# Altium PCB 2layer.PcbDoc (part 2 of 2)
Units mil, origin at the board's own origin, x right, y up, seen from the top; angles counter-clockwise.
Board outline 4180.03 x 3445.03 mil, 2 copper layers (Top Layer, Bottom Layer); 118 components, 103 nets, 464 pads, 261 vias.
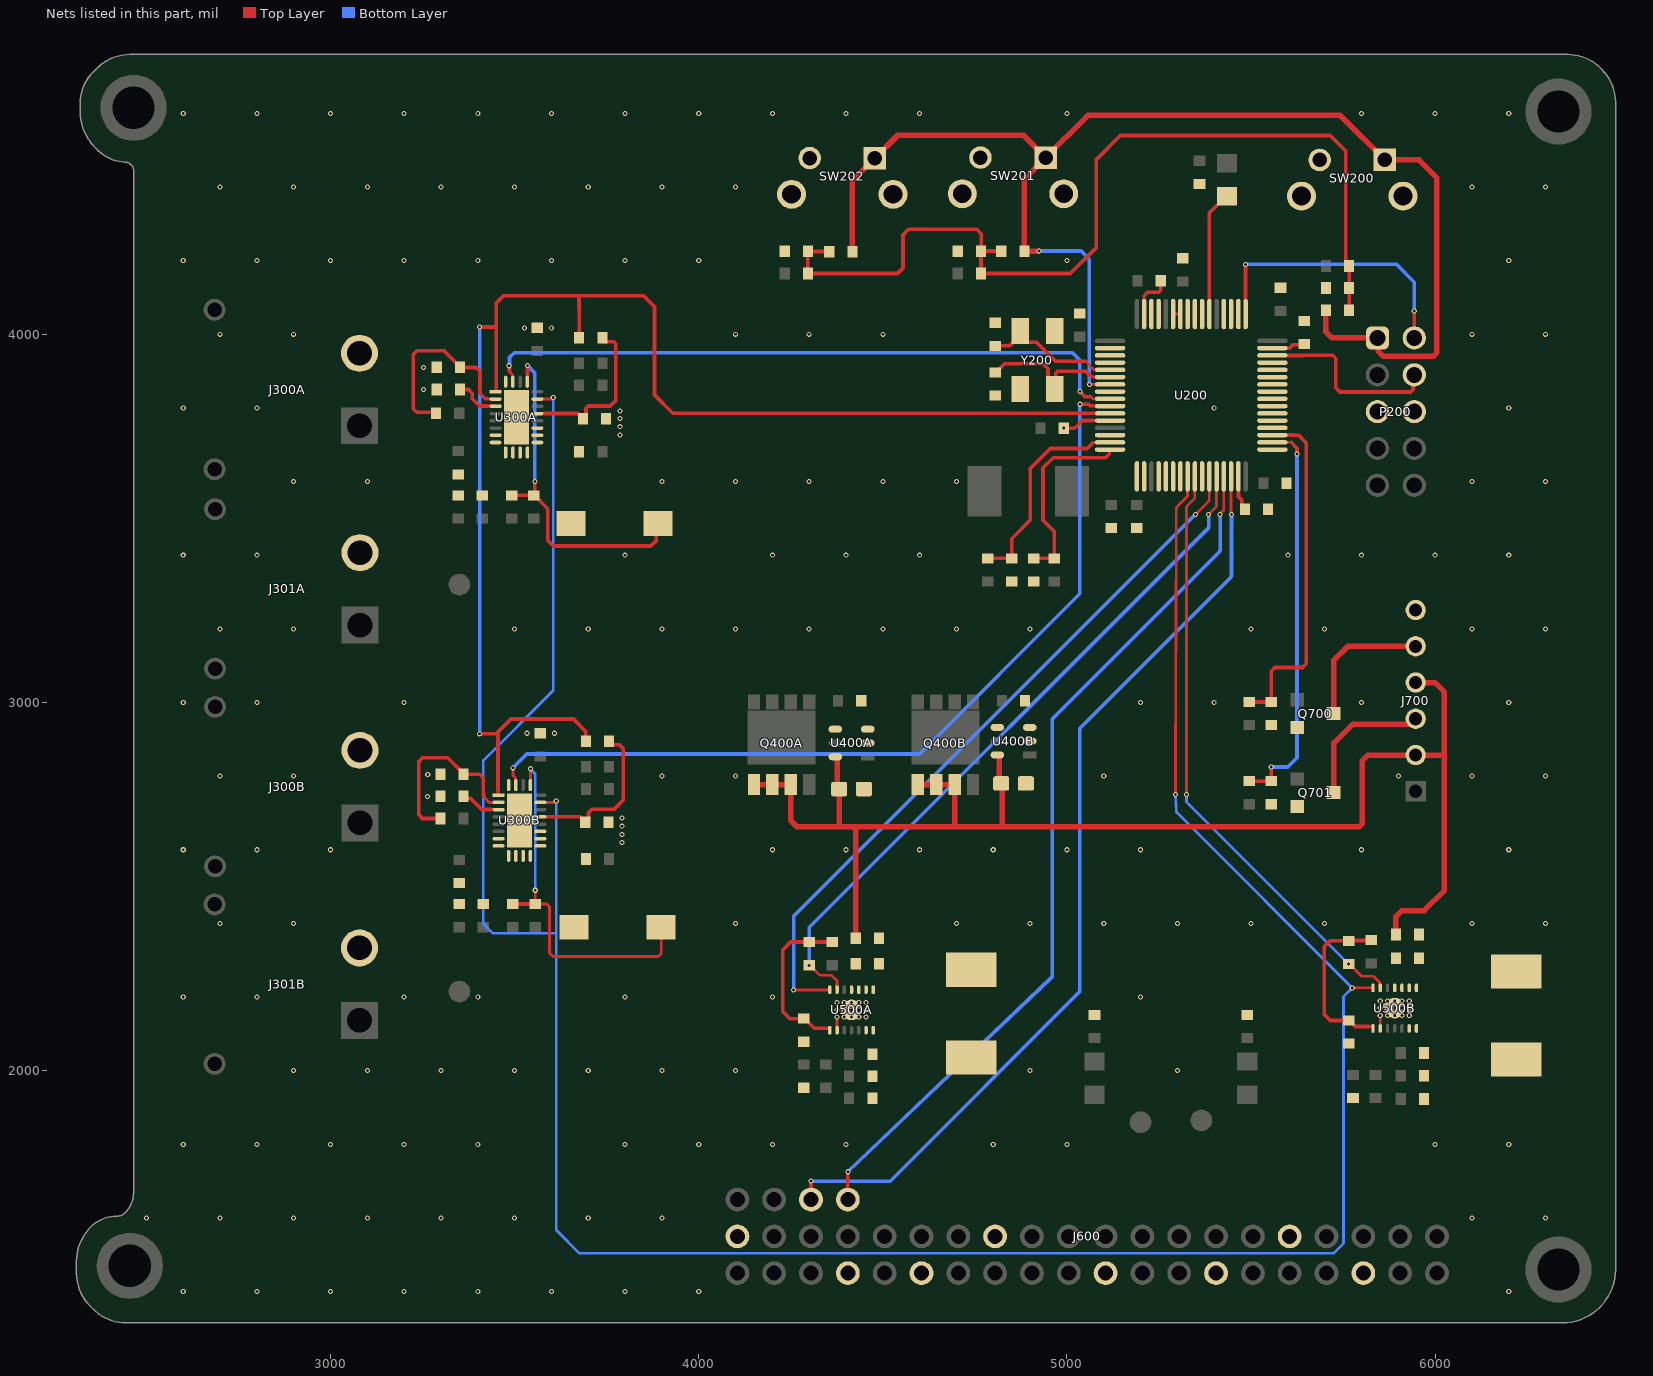
[diagram p2: the nets of this part, all layers, seen from the top]

## Via types
v1: diameter 13.78, hole 7.87, Top Layer to Bottom Layer, 261 vias

## Nets (pads, with @x,y where several pads share a name; then routed paths per layer and width w, separated by ;. In a path a pad name is that pad's centre, name@x,y a point inside that pad or via, vN(x,y) a via of type N, cw(c..) or ccw(c..) an arc to the next point about the centre after c; other vN are vias at no path point) (continued)
GND: C200.1 C201.1 C202.1 C203.1 C204.1 C205.1 C206.1 C207.1 C208.1 C209.1 C210.1 C211.1 C212.1 C213.1 C301A.1 C301B.1 C304A.1 C304B.1 C305A.1 C305B.1 C306A.1 C306B.1 C400A.1 C400B.1 C401A.K C401B.K C500A.1 C500B.1 C501A.1 C501B.1 C502A.2 C502B.2 C503A.2 C503B.2 C504A.2 C504B.2 C505A.1 C505B.1 J300A.N J300B.N J301A.N J301B.N J600.6 J600.9 J600.14 J600.20 J600.25 J600.30 J600.34 J600.39 J700.6 P200.5 P200.6 Q700.3 Q701.3 R202.2 R203.2 R210.2 R304A.1 R304B.1 R305A.1 R305B.1 R306A.2 R306B.2 R503A.2 R503B.2 R701.2 R703.2 R704.2 R705.2 R706.2 SW200.1 SW200.2 SW200.B SW201.1 SW201.2 SW201.B SW202.1 SW202.2 SW202.B U200.12 U200.18 U200.63 U300A.7 U300A.8 U300A.9 U300A.10 U300A.11 U300A.12 U300A.25 U300B.7 U300B.8 U300B.9 U300B.10 U300B.11 U300B.12 U300B.25 U400A.2 U400A.3 U400B.2 U400B.3 U500A.2 U500A.15 U500B.2 U500B.15 Y200.2 Y200.4 | length 331.4
  Top Layer w7.5: U500A.2@4375.63,2109.88 v1(4375.63,2145.32) ; 5069.8,3765.63 U200.12@5117.17,3765.63 ; U200.63@5209.69,4055 5209.69,4104.69 ; U500B.2@5850.94,2114.76 v1(5850.94,2150.2)
  Top Layer w10: v1(4991.5,3745) 5021,3745 5041.63,3765.63 5069.8,3765.63 ; 5209.69,4104.69 5219,4114 5249,4114 5255,4120 C205.1@5255,4145
  other v1: 2600,1400 2800,1400 3000,1400 3200,1400 3400,1400 3600,1400 3800,1400 4000,1400 6200,1400 2500,1600 2700,1600 2900,1600 3100,1600 3300,1600 3500,1600 3700,1600 3900,1600 6100,1600 6300,1600 2600,1800 2800,1800 3000,1800 3200,1800 3400,1800 3800,1800 4000,1800 4200,1800 4400,1800 4800,1800 5000,1800 6000,1800 6200,1800 2900,2000 3100,2000 3300,2000 3500,2000 3700,2000 3900,2000 4100,2000 4900,2000 5300,2000 4395.31,2145.32 4415,2145.32 4434.69,2145.32 4454.37,2145.32 5870.63,2150.2 5890.31,2150.2 5910,2150.2 5929.69,2150.2 4375.63,2165 4395.31,2165 4415,2165 4434.69,2165 4454.37,2165 5850.94,2169.88 5870.63,2169.88 5890.31,2169.88 5910,2169.88 5929.69,2169.88 4375.63,2184.68 4395.31,2184.68 4415,2184.68 4434.69,2184.68 4454.37,2184.68 5850.94,2189.57 5870.63,2189.57 5890.31,2189.57 5910,2189.57 5929.69,2189.57 2600,2200 2800,2200 3200,2200 3400,2200 3800,2200 4200,2200 5200,2200 2700,2400 2900,2400 4100,2400 4700,2400 4900,2400 5100,2400 5300,2400 5500,2400 5700,2400 6100,2400 6300,2400 2600,2600 2800,2600 3000,2600 4200,2600 4400,2600 4600,2600 4800,2600 5000,2600 5200,2600 5800,2600 6200,2600 3792,2620 3792,2642 3792,2664 3792,2686 3263,2745 2700,2800 2900,2800 3900,2800 4100,2800 5100,2800 5900,2800 6100,2800 6300,2800 3264,2804 3533.5,2916.5 3608.5,2916.5 2600,3000 2800,3000 3200,3000 5200,3000 5400,3000 5800,3000 6200,3000 2700,3200 2900,3200 3500,3200 3700,3200 3900,3200 4100,3200 4300,3200 4500,3200 4700,3200 4900,3200 5500,3200 5700,3200 6100,3200 6300,3200 2600,3400 2800,3400 3800,3400 4200,3400 4400,3400 4600,3400 5600,3400 5800,3400 6000,3400 6200,3400 2900,3600 3100,3600 3900,3600 4100,3600 4300,3600 4500,3600 4700,3600 6100,3600 6300,3600 3786,3726 3786,3749 3786,3771 3786,3792 2600,3800 2800,3800 5400,3800 6200,3800 3253,3850 3253,3910 2700,4000 2900,4000 4100,4000 4300,4000 4500,4000 6100,4000 6300,4000 3526.4,4017.6 3599.6,4017.6 2600,4200 2800,4200 3000,4200 3200,4200 3400,4200 3600,4200 3800,4200 4000,4200 5000,4200 6200,4200 2700,4400 2900,4400 3100,4400 3300,4400 3500,4400 3700,4400 3900,4400 4100,4400 6100,4400 6300,4400 2600,4600 2800,4600 3000,4600 3200,4600 3400,4600 3600,4600 3800,4600 4000,4600 4200,4600 4400,4600 4600,4600 5000,4600 5800,4600 6000,4600 6200,4600
ICTRL_A_MPPT_charger1: U300A.24
ICTRL_A_MPPT_charger2: U300B.24
IMON1: U200.9 U300A.23 | length 1808
  Top Layer w7.5: 3485.17,3899.17 3494.77,3889.57 3494.77,3871.48 U300A.23@3495.16,3871.08 ; 5065,3830 5070.29,3824.71 U200.9@5117.14,3824.71
  Top Layer w10: v1(3484.8,3914.66) 3485.9,3913.56 3485.9,3900.2 3486.05,3900.05 ; v1(5035,3845) 5050,3830 5065,3830
  Bottom Layer w10: v1(3484.8,3914.66) 3485.9,3915.76 3485.9,3936.9 3496.07,3947.07 cw(c3503.14,3940) 3503.14,3950 5015,3950 5035,3930 v1(5035,3845)
IMON2: U200.10 U300B.23 | length 2384.3
  Top Layer w7.5: v1(3495.8,2822.66) 3495.8,2801.35 3502.28,2794.87 3502.28,2792.23 3503.05,2791.46 3503.05,2776 U300B.23@3503.44,2775.61 ; 5070,3805.83 5072.79,3805.83 5073.59,3805.03 U200.10@5117.14,3805.03
  Top Layer w10: v1(5035,3810) 5058.48,3810 5062.66,3805.83 5070,3805.83
  Bottom Layer w10: v1(3495.8,2822.66) 3533.15,2860 4600,2860 5035,3295 v1(5035,3810)
INTVcc_A_MPPT_charger1: C306A.2 R302A.2 U300A.17 | length 445.8
  Top Layer w7.5: U300A.17@3561.71,3784.84 3561.79,3784.92 3580,3784.92
  Top Layer w10: 3580,3784.92 3603.2,3784.92 3603.28,3785 3671.21,3785 3674.51,3781.7 3676.48,3781.7 3685.26,3772.92 C306A.2@3685.26,3770.95 3694.04,3779.73 3694.04,3799.04 3700,3805 3760,3805 3775,3820 3775,3974.14 3769.14,3980 3739.31,3980 R302A.2@3738.21,3981.1
INTVcc_A_MPPT_charger2: C306B.2 R302B.2 U300B.17 | length 451.7
  Top Layer w7.5: U300B.17@3570,2689.37 3570.08,2689.45 3588.49,2689.45
  Top Layer w10: 3588.49,2689.45 3677.56,2689.45 3681.26,2685.75 3683.23,2685.75 3692.01,2676.97 C306B.2@3692.01,2675 3700.79,2683.78 3700.79,2700.79 3710,2710 3770,2710 3795,2735 3795,2875 3785,2885 3761.5,2885 R302B.2@3756.5,2890
ISP_A_MPPT_charger1: C302A.1 L300A.2 R300A.2 U300A.21 | length 961.3
  Top Layer w7.5: U300A.21@3534.53,3871.08 3534.92,3871.48 3534.92,3889.92 3535,3890
  Top Layer w10: R300A.2@3491.71,3562.6 C302A.1@3551.71,3562.6 ; 3535,3890 v1(3535,3915) ; v1(3555,3600) 3555,3565.88 C302A.1@3551.71,3562.6 ; L300A.2@3889.82,3486.1 3885,3481.28 3885,3440 3870,3425 3605,3425 3590,3440 3590,3526.28 3553.68,3562.6 C302A.1@3551.71,3562.6
  Bottom Layer w10: v1(3535,3915) 3555,3895 v1(3555,3600)
ISP_A_MPPT_charger2: C302B.1 L300B.2 R300B.2 U300B.21 | length 1028.2
  Top Layer w7.5: U300B.21@3542.81,2775.61 3543,2775.8 v1(3543,2820) ; v1(3556,2490) C302B.1@3556,2452.5 3587.5,2452.5 3595,2445 3595,2320 3605,2310 3890,2310 3898.11,2318.11 L300B.2@3898.11,2390
  Top Layer w10: R300B.2@3495,2452.99 3495.25,2452.74 3555.75,2452.74 C302B.1@3556,2452.5
  Bottom Layer w7.5: v1(3543,2820) 3543,2818.95 3556,2805.95 v1(3556,2490)
L1_A: L500A.2 U500A.8 U500A.9
L1_B: L500B.2 U500B.8 U500B.9
L2_A: L500A.1 U500A.6 U500A.7
L2_B: L500B.1 U500B.6 U500B.7
MODE_3V3: R500B.2 U200.25 U500B.13 | length 1636.4
  Top Layer w7.5: v1(5325,2750) 5325,3529.58 cw(c5332.5,3529.58) 5327.2,3534.89 5347.48,3555.17 U200.25@5347.48,3614.06 ; v1(5765,2289.5) 5766.97,2289.5 5800.06,2256.42 5833.06,2256.42 5850.57,2238.9 5850.57,2225.37 U500B.13@5850.94,2225
  Bottom Layer w7.5: v1(5325,2750) 5325,2729.5 v1(5765,2289.5)
MODE_5V: R500A.2 U200.28 U500A.13 | length 1903.3
  Top Layer w7.5: R500A.2@4300,2286.5 4301.97,2286.5 4329.5,2258.97 4361.03,2258.97 4375.63,2244.37 U500A.13@4375.63,2220.12 ; v1(5385,3511) 5406.54,3532.54 U200.28@5406.54,3614.06
  Bottom Layer w10: v1(4300,2286) 4300.5,2286.5 4300.5,2389.5 5382.09,3471.09 ccw(c5375,3478.14) 5385,3478.14 v1(5385,3511)
NetC212_2: C212.2 U200.47 | length 91.5
  Top Layer w7.5: U200.47@5558.11,3962.48 5605,3962.45
  Top Layer w10: 5605,3962.45 5614.25,3971.7 5643.2,3971.7 C212.2@5645,3973.5
NetR302A_MPPT_charger1_1: R302A.1 R302B.1 U200.11 U300A.1 U300B.1 | length 3976.9
  Top Layer w7.5: U300A.1@3448.29,3843.9 3448.98,3843.9 3450,3844.92 3450,3850 ; 3455,2760 3455,2749.45 3456.02,2748.43 U300B.1@3456.57,2748.43 ; 5073.59,3785.29 U200.11@5117.14,3785.29
  Top Layer w10: v1(3405,2915) 3450,2915 3455,2920 ; v1(3405,4020) 3450,4020 ; 3450,3850 3450,4020 ; 3455,2760 3455,2920 ; R302A.1@3675.22,3991.1 3675.22,4075.22 3675,4075.44 3675,4105 ; R302B.1@3693.5,2890 3693.5,2921.5 3660,2955 3490,2955 3455,2920 ; 5073.05,3785.83 3929.17,3785.83 3880,3835 3880,4075 3850,4105 3675,4105 ; 3450,4020 3450,4085 3470,4105 3675,4105
  Bottom Layer w10: v1(3405,2915) v1(3405,4020)
NRST: P200.1 R207.2 R208.2 R209.2 SW200.A SW201.A SW202.A U200.7 | length 3720.2
  Top Layer w7.5: v1(5060.94,3864.06) U200.7@5117.17,3864.06
  Top Layer w15: R209.2@4417.34,4224.59 4417.34,4417.34 SW202.A@4478.58,4478.58 4540.61,4540.61 4881.56,4540.61 SW201.A@4942.17,4480 ; v1(4924,4226) R208.2@4884.5,4226 4884.5,4422.33 SW201.A@4942.17,4480 ; R207.2@5703.48,4065.59 5703.48,4006.52 5720,3990 P200.1@5843.35,3990 5845,3988.35 5845,3955 5860,3940 5995,3940 6005,3950 6005,4425 5956.42,4473.58 SW200.A@5863.58,4473.58 5745.09,4592.07 ccw(c5738.02,4585) 5738.02,4595 5061.31,4595 ccw(c5061.31,4585) 5054.24,4592.07 SW201.A@4942.17,4480
  Bottom Layer w10: v1(4924,4226) 5039,4226 5060.94,4204.06 v1(5060.94,3864.06)
NRST_NDB: C207.2 C208.2 C209.2 R204.2 R205.2 R206.2 R207.1 R208.1 R209.1 | length 2598.1
  Top Layer w10: R209.1@4354.35,4224.59 4353.94,4225 C209.2@4296.5,4225 R206.2@4296.5,4165 4540,4165 4555,4180 4555,4270 4570,4285 4755,4285 4767.5,4272.5 C208.2@4767.5,4226 ; R208.1@4821.5,4226 C208.2@4767.5,4226 ; R207.1@5766.48,4065.59 C207.2@5766.48,4125.59 R204.2@5766.48,4185.59 5757.7,4194.37 5757.7,4497.3 5715,4540 5145,4540 5080,4475 5080,4236 5009,4165 R205.2@4766.5,4165 C208.2@4766.5,4225 C208.2@4767.5,4226
OSC_IN: C211.2 U200.5 Y200.3 | length 374.5
  Top Layer w7.5: 5050,3927.05 5073.59,3903.45 U200.5@5117.14,3903.45
  Top Layer w10: C211.2@4805,3968.5 4844.33,3968.5 Y200.3@4872.76,3996.93 ; Y200.3@4872.76,4008.74 Y200.3@4872.76,3996.93 ; 5050,3927.05 4968.67,3927.05 4917.41,3978.31 4891.38,3978.31 Y200.3@4872.76,3996.93
OSC_OUT: C210.2 U200.6 Y200.1 | length 422.2
  Top Layer w7.5: 5062.36,3888.17 5064.57,3885.95 5068.23,3885.95 5070.42,3883.77 U200.6@5117.14,3883.77
  Top Layer w10: C210.2@4805,3896.5 4806.97,3896.5 4830.47,3920 4935,3920 4948.62,3906.38 4948.62,3869.88 Y200.1@4967.24,3851.26 4970,3854.02 4970,3894.14 4975.86,3900 5050.53,3900 5062.36,3888.17
PA0: U200.14
PA3: U200.17
PA4: U200.20
PA5: U200.21
PA6: U200.22
PA7: U200.23
PA8: U200.41
PA9: U200.42
PA10: U200.43
PA11: U200.44
PA12: U200.45
PA15: U200.50
PB0: U200.26
PB3: U200.55
PB4: U200.56
PB5: U200.57
PB8: U200.61
PB9: U200.62
PB12: U200.33
PB15: U200.36
PC0: U200.8
PC6: U200.37
PC7: U200.38
PC8: U200.39
PC9: U200.40
PC10: U200.51
PC11: U200.52
PC15: U200.4
PG: U200.58 U200.59 | length 19.7
  Top Layer w7.5: U200.59@5288.43,4055 U200.58@5308.11,4055
PG1: 
PG2: 
"PG 5V": U200.27 U500A.14 | length 1962.8
  Top Layer w7.5: v1(4257,2219) 4355.94,2219 U500A.14@4355.94,2220.12 ; v1(5348.71,3510.29) 5384.67,3546.25 ccw(c5379.35,3551.54) 5386.85,3551.54 U200.27@5386.85,3614.06
  Bottom Layer w10: v1(4257,2219) 4257.71,2219.71 4257.71,2419.29 v1(5348.71,3510.29)
PG_3V3: U200.24 U300A.19 U300B.19 U500B.14 | length 7506.9
  Top Layer w7.5: U300A.19@3561.71,3824.21 3599.51,3824.21 3603.3,3828 v1(3605,3828) ; U300B.19@3570,2728.74 3607.04,2728.74 3611.3,2733 v1(3613,2733) ; v1(5295,2750) 5296.99,3526.39 cw(c5304.49,3526.32) 5299.19,3531.63 5327.8,3560.24 U200.24@5327.8,3614.06 ; v1(5775,2225) U500B.14@5831.26,2225
  Bottom Layer w7.5: v1(3605,3828) 3605,3033 3415,2843 3415,2399 3441,2373 3613,2373 ; v1(3613,2733) 3613,2373 ; v1(5295,2750) 5296.97,2706.12 cw(c5289.47,2705.81) 5296.97,2705.97 ccw(c5304.47,2706.14) 5299.14,2700.86 v1(5775,2225) 5751.03,2201.03 5751.03,1530.93 5724.07,1503.96 3676.03,1503.96 3613,1567 3613,2373
POWER_O1: J700.5 Q700.2 | length 383.1
  Top Layer w15: Q700.2@5724.21,2970 5725,2970.79 5725,3115 5762.64,3152.64 J700.5@5947.17,3152.64
POWER_O2: J700.3 Q701.2 | length 378.5
  Top Layer w15: Q701.2@5724.21,2755 5725,2755.79 5725,2890 5775.79,2940.79 J700.3@5947.17,2940.79
PW_sw_1: R700.2 R701.1 U200.35 | length 947.8
  Top Layer w7.5: U200.35@5558.11,3726.26 5603.45,3726.29 5603.77,3726.6
  Top Layer w10: R700.2@5495,3001.5 R701.1@5555,3001.5 5555,3085 5565,3095 5640,3095 5650,3105 5650,3705 5628.77,3726.23 5612.78,3726.23 5612.41,3726.6 5603.77,3726.6
PW_sw_2: R702.2 R703.1 U200.34 | length 1093.1
  Top Layer w7.5: U200.34@5558.11,3706.57 5558.2,3706.55 5609.18,3706.55
  Top Layer w10: R702.2@5495,2786.5 R703.1@5555,2786.5 v1(5555,2825) ; 5609.18,3706.55 5625,3690.73 v1(5625,3675)
  Bottom Layer w10: v1(5555,2825) 5600,2825 5625,2850 v1(5625,3675)
RT_A_MPPT_charger1: R305A.2 U300A.3 | length 132.7
  Top Layer w7.5: 3430,3805 3430.08,3804.92 3447.89,3804.92 U300A.3@3448.29,3804.53
  Top Layer w10: R305A.2@3357.35,3844.14 R305A.2@3351.5,3850 3375,3850 3385,3840 3385,3825 3405,3805 3430,3805
RT_A_MPPT_charger2: R305B.2 U300B.3 | length 110
  Top Layer w7.5: 3435.54,2709.45 3456.18,2709.45 U300B.3@3456.57,2709.06
  Top Layer w10: R305B.2@3361.5,2745 3366.5,2740 3380,2740 3410.55,2709.45 3435.54,2709.45
RX: J600.43 U200.30 | length 2562.1
  Top Layer w7.5: U200.30@5445.94,3614.03 5445.94,3511.34 v1(5446.87,3510.41)
  Top Layer w10: J600.43@4305,1650 v1(4305,1700)
  Bottom Layer w10: v1(4305,1700) 4520,1700 5032.09,2212.09 ccw(c5025,2219.14) 5035,2219.14 5035,2925.86 cw(c5045,2925.86) 5037.93,2932.93 5443.96,3338.96 ccw(c5436.87,3346.01) 5446.87,3346.01 v1(5446.87,3510.41)
"STAT_A_Ideal Diode1": U400A.4
"STAT_A_Ideal Diode2": U400B.4
SW_A_MPPT_charger1: C300A.1 L300A.1 U300A.13 U300A.14 U300A.15
SW_A_MPPT_charger2: C300B.1 L300B.1 U300B.13 U300B.14 U300B.15
SWCLK: P200.2 U200.49 | length 765.1
  Top Layer w7.5: 5485,4100 5485,4098.82 5485.25,4098.57 U200.49@5485.25,4055.03
  Top Layer w10: 5485,4100 v1(5485,4190) ; P200.2@5943.35,3990 v1(5943.35,4063.35)
  Bottom Layer w10: v1(5485,4190) 5895,4190 5943.35,4141.65 v1(5943.35,4063.35)
SWDIO: P200.4 U200.46 | length 514.2
  Top Layer w7.5: U200.46@5558.11,3942.8 5601.92,3942.77 5602.23,3942.45
  Top Layer w10: 5602.23,3942.45 5642.23,3942.45 5642.55,3942.77 5722.23,3942.77 5730,3935 5730,3855 5741.5,3843.5 5933.5,3843.5 5940,3850 5940,3886.65 P200.4@5943.35,3890
TR/SS_A_MPPT_charger1: R301A.1 R304A.2 U300A.2 | length 529.4
  Top Layer w7.5: 3426.88,3825 3427.27,3824.6 3447.89,3824.6 U300A.2@3448.29,3824.21
  Top Layer w10: R301A.1@3286.5,3786 3284.5,3788 3235,3788 3225,3798 3225,3945 3235,3955 3308.46,3955 3351.5,3911.97 R304A.2@3351.5,3910 ; R304A.2@3353.46,3910 3395,3910 3405,3900 3405,3840 3420,3825 3426.88,3825
TR/SS_A_MPPT_charger2: R301B.1 R304B.2 U300B.2 | length 508.2
  Top Layer w7.6: 3417.93,2744.72 3417.93,2742.07 3431.26,2728.74 U300B.2@3456.57,2728.74
  Top Layer w10: R301B.1@3298.5,2685 3250,2685 3240,2695 3240,2840 3250,2850 3318.46,2850 3361.5,2806.97 R304B.2@3361.5,2805 3405,2805 3412.07,2797.93 cw(c3405,2790.86) 3415,2790.86 3415,2751.79 ccw(c3425,2751.79) 3417.93,2744.72
TX: J600.44 U200.29 | length 2393.5
  Top Layer w7.5: v1(5416,3511) 5416,3513.23 5426.22,3523.45 U200.29@5426.22,3614.06
  Top Layer w10: J600.44@4405,1650 v1(4405,1725.61)
  Bottom Layer w10: v1(4405,1725.61) 4956.9,2251.97 ccw(c4950,2259.21) 4960,2259.1 ; 4960,2259.14 4960,2950.86 cw(c4970,2950.86) 4962.9,2957.9 5413.05,3408.05 ccw(c5406,3415.14) 5416,3415.14 v1(5416,3511)
"USER_BUTTON 0": U200.2
"USER_BUTTON 1": U200.3
USER_LED: D700.1 U200.54 | length 341.4
  Top Layer w7.5: U200.54@5386.85,4055 5386.85,4100.07
  Top Layer w10: 5386.85,4100.07 5386.85,4329.35 5432.5,4375 D700.1@5435,4375
VBAT1_DIV: R200.2 R202.1 U200.15 | length 576
  Top Layer w7.5: 5070,3705 5071.57,3706.57 U200.15@5117.17,3706.57
  Top Layer w10: R200.2@4785,3391.5 R202.1@4850,3391.5 4850,3445 4900,3495 4900,3635 4955,3690 5055,3690 5070,3705
VBAT2_DIV: R201.2 R203.1 U200.16 | length 522.6
  Top Layer w7.5: 5115,3675 5115,3684.9 5116.99,3686.89 U200.16@5117.17,3686.89
  Top Layer w10: R203.1@4910,3391.5 R201.2@4965.63,3391.48 ; R201.2@4965.63,3391.48 4965.63,3464.37 4935,3495 4935,3637.28 4962.72,3665 5105,3665 5115,3675
VBUS: C401A.A C401B.A C500A.2 C500B.2 C501A.2 C501B.2 J700.2 J700.4 Q400A.1 Q400A.2 Q400A.3 Q400B.1 Q400B.2 Q400B.3 U400A.6 U400B.6 U500A.10 U500A.11 U500B.10 U500B.11 | length 3917.4
  Top Layer w15: Q400A.1@4150,2776.73 Q400A.2@4200,2776.73 Q400A.3@4250,2776.73 4250,2680 4267.62,2662.38 4385,2662.38 ; U400A.6@4371.08,2852.6 4374.4,2852.6 4376.31,2850.69 4376.31,2770.23 C401A.A@4381.54,2765 4381.54,2665.85 4385,2662.38 ; C501A.2@4426.5,2360 4426.5,2649.66 ccw(c4411.5,2649.66) 4422.12,2660.27 4420,2662.38 ; Q400B.1@4595,2776.73 Q400B.2@4645,2776.73 Q400B.3@4695,2776.73 4695,2662.38 ; U400B.6@4811.08,2857.6 4814.4,2857.6 4816.31,2855.69 4816.31,2785.23 C401B.A@4821.54,2780 4825,2776.54 4825,2662.38 ; C501B.2@5893.5,2370 5893.5,2418.5 5910,2435 5970,2435 6025,2490 6025,2860 ; J700.4@5947.17,3054.21 5999.21,3054.21 6025,3028.43 6025,2860 ; 4385,2662.38 4420,2662.38 ; 4420,2662.38 4422.12,2662.38 4695,2662.38 ; 4695,2662.38 4825,2662.38 ; 4825,2662.38 5793.6,2662.38 5802.38,2671.17 5802.38,2842.38 5817.36,2857.36 J700.2@5947.17,2857.36 6022.36,2857.36 6025,2860
VCAP_1: C213.2 U200.31 | length 96.5
  Top Layer w7.5: U200.31@5465.59,3614.06 5465.59,3576.76 5465.72,3576.63 5465.72,3570.56 5466.19,3570.09
  Top Layer w10: 5466.19,3570.09 5466.19,3558.81 5474.72,3550.28 5474.72,3533.78 C213.2@5483.5,3525
VINA_TPS_A: C505A.2 R500A.1 R502A.1 U500A.1 | length 462.5
  Top Layer w7.5: 4350,2115 4355.04,2115 4355.94,2114.1 U500A.1@4355.94,2109.88
  Top Layer w10: 4350,2115 4313.46,2115 4286.97,2141.5 C505A.2@4285,2141.5 4247.5,2141.5 4228,2161 4228,2328 4249.5,2349.5 R500A.1@4300,2349.5 R502A.1@4363,2349.5
VINA_TPS_B: C505B.2 R500B.1 R502B.1 U500B.1 | length 469.2
  Top Layer w7.5: 5820,2120 5830.36,2120 5831.26,2119.1 U500B.1@5831.26,2114.76
  Top Layer w10: 5820,2120 5783.46,2120 5766.97,2136.5 C505B.2@5765,2136.5 5715,2136.5 5699,2152.5 5699,2337 5714.5,2352.5 R500B.1@5765,2352.5 5766,2353.5 5825,2353.5 R502B.1@5826,2354.5
pads on no net: J300A.S1 J300A.S2 J300B.S1 J300B.S2 J301A.S1 J301A.S2 J301B.S1 J301B.S2 J600.1 J600.3 J600.5 J600.7 J600.8 J600.10 J600.11 J600.12 J600.13 J600.15 J600.16 J600.17 J600.18 J600.19 J600.21 J600.22 J600.23 J600.24 J600.26 J600.27 J600.28 J600.29 J600.31 J600.32 J600.33 J600.35 J600.36 J600.37 J600.38 J600.40 P200.3 Q400A.9 Q400B.9 U200.53
copper on no net:
  other v1: 4573,2145 6049,2151 4573,2165 6049,2173 4573,2186 6049,2194

## Polygon pours and split planes (outlines as drawn)
GND on Top Layer "GND_L01_P114" (solid, pour order 114): 2465,4730 2454.5,4730 2410,4725 2355,4670 2350,4665 2345,4655 2350,4580 2355,4565 2360,4550 2390,4520 2400,4510 2420,4495 2474.43,4490.46 2495.44,4469.45 2500.01,1615.01 2470.79,1591.35 2420,1585 2410,1580 2390,1570 2370,1550 2340,1515 2335,1495 2335,1440 2345,1415 2355,1400 2370,1380 2375,1375 2380,1370 2405,1350 6395,1350 6445,1400 6450,1405 6455,1410 6455,4665.01 6390.01,4730 2420,4730
VBUS on Top Layer "VBUS_L01_P097" (solid, pour order 97): 5917,2219 5915,2217 5915,2213 5887,2213 5885,2215 5885,2272 5879,2278 5879,2393 5912,2393 5917,2388 5917,2221
SW_A_MPPT_charger2 on Top Layer "SW_A_MPPT_CHARGER2_L01_P067" (solid, pour order 67): 3557,2659 3551,2653 3551,2609 3555,2605 3611,2605 3670,2546 3670,2439 3662,2431 3618,2431 3611,2424 3611,2354 3621,2344 3706,2344 3716,2354 3716,2598 3709,2605 3671,2605 3617,2659 3561,2659
FB_A_MPPT_charger2 on Top Layer "FB_A_MPPT_CHARGER2_L01_P103" (solid, pour order 103): 3709,2842 3709,2751 3705,2747 3702,2750 3597,2750 3587,2745 3554,2742 3554,2745 3550,2749 3551,2750 3551,2755 3552,2755 3562,2765 3562,2828 3550,2840 3550,2869 3552,2871 3589,2871 3618,2842 3708,2842
FB_A_MPPT_charger1 on Top Layer "FB_A_MPPT_CHARGER1_L01_P102" (solid, pour order 102): 3689,3938 3689,3846 3582,3846 3576,3840 3576,3838 3548,3838 3544,3842 3544,3850 3555,3861 3555,3934 3542,3934 3537,3939 3538,3940 3538,3974 3581,3974 3614,3941 3692,3941
VBUS on Top Layer "VBUS_L01_P096" (solid, pour order 96): 4443,2211 4439,2207 4411,2207 4406,2212 4406,2403 4414,2411 4444,2411 4444,2386 4444,2382 4443,2375
3.3V on Top Layer "3.3V_L01_P046" (solid, pour order 46): 5888,2128 5915,2128 5915,2075 5921,2075 5928,2068 5928,1903 5926,1901 5821,1901 5814,1908 5814,1947 5821,1954 5865,1954 5885,1974 5885,2125
5V on Top Layer "5V_L01_P044" (solid, pour order 44): 4416,2123 4439,2122 4440,2103 4427,2087 4427,1907 4421,1901 4421,1900 4393,1900 4361,1932 4326,1932 4321,1937 4321,1971 4319,1973 4322,1976 4360,1976 4384,2000 4386,2000 4386,2064 4398,2072 4405,2073 4409,2079 4409,2118 4410,2118
L2_B on Top Layer "L2_B_L01_P093" (solid, pour order 93): 5923,2104 5923,2126 5929,2132 6294,2132 6303,2123 6303,1982 6294,1973 6146,1973
L2_A on Top Layer "L2_A_L01_P092" (solid, pour order 92): 4447,2100 4447,2121 4451,2125 4481,2125 4484,2122 4784,2122 4822,2084 4822,1986 4813,1977 4671,1977 4669,1979
L1_B on Top Layer "L1_B_L01_P085" (solid, pour order 85): 5925,2240.91 5925,2210.91 6285.91,2210.91 6300,2225 6300,2335.91 6290,2340 6134.09,2340 6134.09,2298.41
L1_A on Top Layer "L1_A_L01_P084" (solid, pour order 84): 4450,2235 4450,2205 4805,2205 4825,2225 4825,2330 4810,2345 4665,2345 4650,2330 4650,2290
EN_A_MPPT_charger2 on Top Layer "EN_A_MPPT_CHARGER2_L01_P073" (solid, pour order 73): 3471,2695 3473,2693 3474,2693 3474,2647 3472,2645 3395,2645 3376,2626 3376,2557 3369,2550 3326,2550 3326,2555 3326,2559 3325,2562 3325,2615 3341,2631 3341,2702 3342,2702 3349,2709 3384,2709 3398,2695
EN_A_MPPT_charger1 on Top Layer "EN_A_MPPT_CHARGER1_L01_P080" (solid, pour order 80): 3013.7,3808.43 3013.7,3698.43 3028.7,3683.43 3163.7,3683.43 3178.7,3688.43 3186.7,3690.43 3339.7,3690.43 3339.7,3735.43 3336.7,3738.43 3158.7,3738.43 3138.7,3758.43 3138.7,3806.96 3127.24,3818.43 3023.7,3818.43
EN_A_MPPT_charger2 on Top Layer "EN_A_MPPT_CHARGER2_L01_P078" (solid, pour order 78): 3015,2730 3015,2620 3030,2605 3165,2605 3180,2610 3188,2612 3341,2612 3341,2657 3338,2660 3160,2660 3140,2680 3140,2725 3125,2740 3025,2740
EN_A_MPPT_charger1 on Top Layer "EN_A_MPPT_CHARGER1_L01_P071" (solid, pour order 71): 3466,3790 3468,3788 3468,3742 3466,3740 3402,3740 3371,3709 3371,3667 3366,3662 3366,3661 3327,3661 3321,3667 3319,3667 3319,3709 3329,3719 3329,3807 3336,3814 3370,3814 3369,3813 3375,3807 3375,3796 3381,3790
SW_A_MPPT_charger1 on Top Layer "SW_A_MPPT_CHARGER1_L01_P061" (solid, pour order 61): 3699,3616.28 3699,3449 3691,3441 3690,3442 3610,3442 3604,3448 3604,3678 3600.1,3681.9
SW_A_MPPT_charger1 on Top Layer "SW_A_MPPT_CHARGER1_L01_P060" (solid, pour order 60): 3550,3752.81 3543,3751.41 3545,3702 3579.12,3698 3629.04,3648.08 3638.68,3648.08 3699,3609.92 3699,3673.81 3698,3674.81 3699,3675.81 3699,3706.66 3620.08,3706.66 3592,3738.81 3590,3740.81 3588.37,3748.45 3584,3752.81
GND on Bottom Layer "GND_L02_P115" (solid, pour order 115): 2465.99,4727.99 2455.49,4727.99 2410.99,4722.99 2355.99,4667.99 2350.99,4662.99 2345.99,4652.99 2350.99,4577.99 2355.99,4562.99 2360.99,4547.99 2390.99,4517.99 2400.99,4507.99 2420.99,4492.99 2475.42,4488.46 2496.43,4467.45 2501,1613 2471.78,1589.35 2420.99,1582.99 2410.99,1577.99 2390.99,1567.99 2370.99,1547.99 2340.99,1512.99 2335.99,1492.99 2335.99,1437.99 2345.99,1412.99 2355.99,1397.99 2370.99,1377.99 2375.99,1372.99 2380.99,1367.99 2405.99,1347.99 6395.99,1347.99 6445.99,1397.99 6450.99,1402.99 6455.99,1407.99 6455.99,4663.01 6391.01,4727.99 2420.99,4727.99

## Silkscreen, mask and mechanical layers (free items; w line width, h text height)
Top Overlay:
  text "Solar input" at 2713.5,4524 h60
  text "Battery" at 3655.06,4480 h55
  text "RESET" at 5600,4475 h40 r90
  text "voltage range:" at 2646,4394 h60
  text "Li-Ion 1$" at 3594.64,4360 h55
  text "USER BTN 0" at 5105,4330 h40 r90
  text "USER BTN 1" at 4175,4325 h40 r90
  text "3.4V to 42V" at 2713.5,4294 h60
  text "[ ]" at 2605,4245 h400
  text "[]" at 3605,4245 h400
  text "SOLAR 1" at 2755,4065 h50
  text "VBAT 1" at 2755,3525 h50
  text "VBAT1" at 3265,3380 h40
  text "SOLAR 2" at 2755,2985 h55
  text "VBAT 2" at 2755,2450 h50
  text "VBAT2" at 3265,2275 h40
  text "ESP" at 2932.5,1720 h60
  text "2 layer board" at 2825,1590 h60
  text "11/09/2024" at 2920.5,1482 h60
  text "[ ]" at 2816,1420 h410
Mechanical 1:
  lines w10: 2420,1600 ccw(c2420,1503.79) 2351.97,1571.82 ccw(c2441.21,1482.57) 2315,1482.57 ; 2420.86,1600 ccw(c2420.86,1634.14) 2445,1610 ; 2445.61,1610.61 ccw(c2386.72,1669.5) 2470,1669.5 ; 2459.35,4466.83 ccw(c2451.69,4460.41) 2455.51,4469.65 ; 2470,1669.24 2470,4446.26 ccw(c2446.62,4446.26) 2458.76,4466.24 2455.62,4469.38 cw(c2455.89,4469.65) 2455.5,4469.65 ; 2315,1482.57 2315,1482.53 ; 2315,1482.53 2315,1460 2315,1450 ccw(c2435.71,1450) 2350.36,1364.64 2359.64,1355.36 ccw(c2445,1440.71) 2445,1320 6344.96,1320 6345,1320 ccw(c6345,1460) 6485,1459.83 6485,1460 6485,4630.5 ccw(c6365.5,4630.5) 6450,4715 6445.36,4719.64 ccw(c6360,4634.29) 6360,4755 2499.14,4755 2454.5,4755 ccw(c2454.5,4635.5) 2370,4720 2359.75,4709.75 ccw(c2443.77,4625.72) 2324.94,4625.82 ; 2324.94,4625.82 ccw(c2443.77,4625.72) 2324.94,4625.78 ; 2324.94,4625.78 2325.05,4606.26 ccw(c2461.02,4606.18) 2368.18,4506.83 ccw(c2446.15,4578.26) 2442.03,4472.6 cw(c2440.53,4433.41) 2455.51,4469.65

## Text inside footprints (layer, text, board x,y; h text height)
C401A: Top Overlay "+" at 4301.88,2685.32 h39.37; Mechanical 13 "+" at 4396.88,2740.32 h39.37
C401B: Top Overlay "+" at 4746.88,2700.32 h39.37; Mechanical 13 "+" at 4851.88,2770.32 h39.37
J600: Mechanical 16 "1" at 6136.65,1525 h77.5; Mechanical 16 "2" at 6136.65,1425 h77.5; Mechanical 16 "39" at 4013.86,1525 h77.5; Mechanical 16 "40" at 4013.86,1425 h77.5; Mechanical 40 "2.540" at 6108.5,1337.48 h15.5; Mechanical 40 "51.308" at 5086.5,1237.48 h15.5; Mechanical 40 "48.260" at 5086.5,1297.48 h15.5; Bottom Overlay "41" at 4013.86,1625 h77.5; Bottom Overlay "1" at 6136.65,1525 h77.5; Bottom Overlay "2" at 6136.65,1425 h77.5; Bottom Overlay "39" at 4013.86,1525 h77.5; Bottom Overlay "40" at 4013.86,1425 h77.5